# Altium PCB PCB.PcbDoc
Units mm, origin at the board's own origin, x right, y up, seen from the top; angles counter-clockwise.
Board outline 41.15 x 38.1 mm, 2 copper layers (Top Layer, Bottom Layer); 17 components, 12 nets, 47 pads, 4 vias.
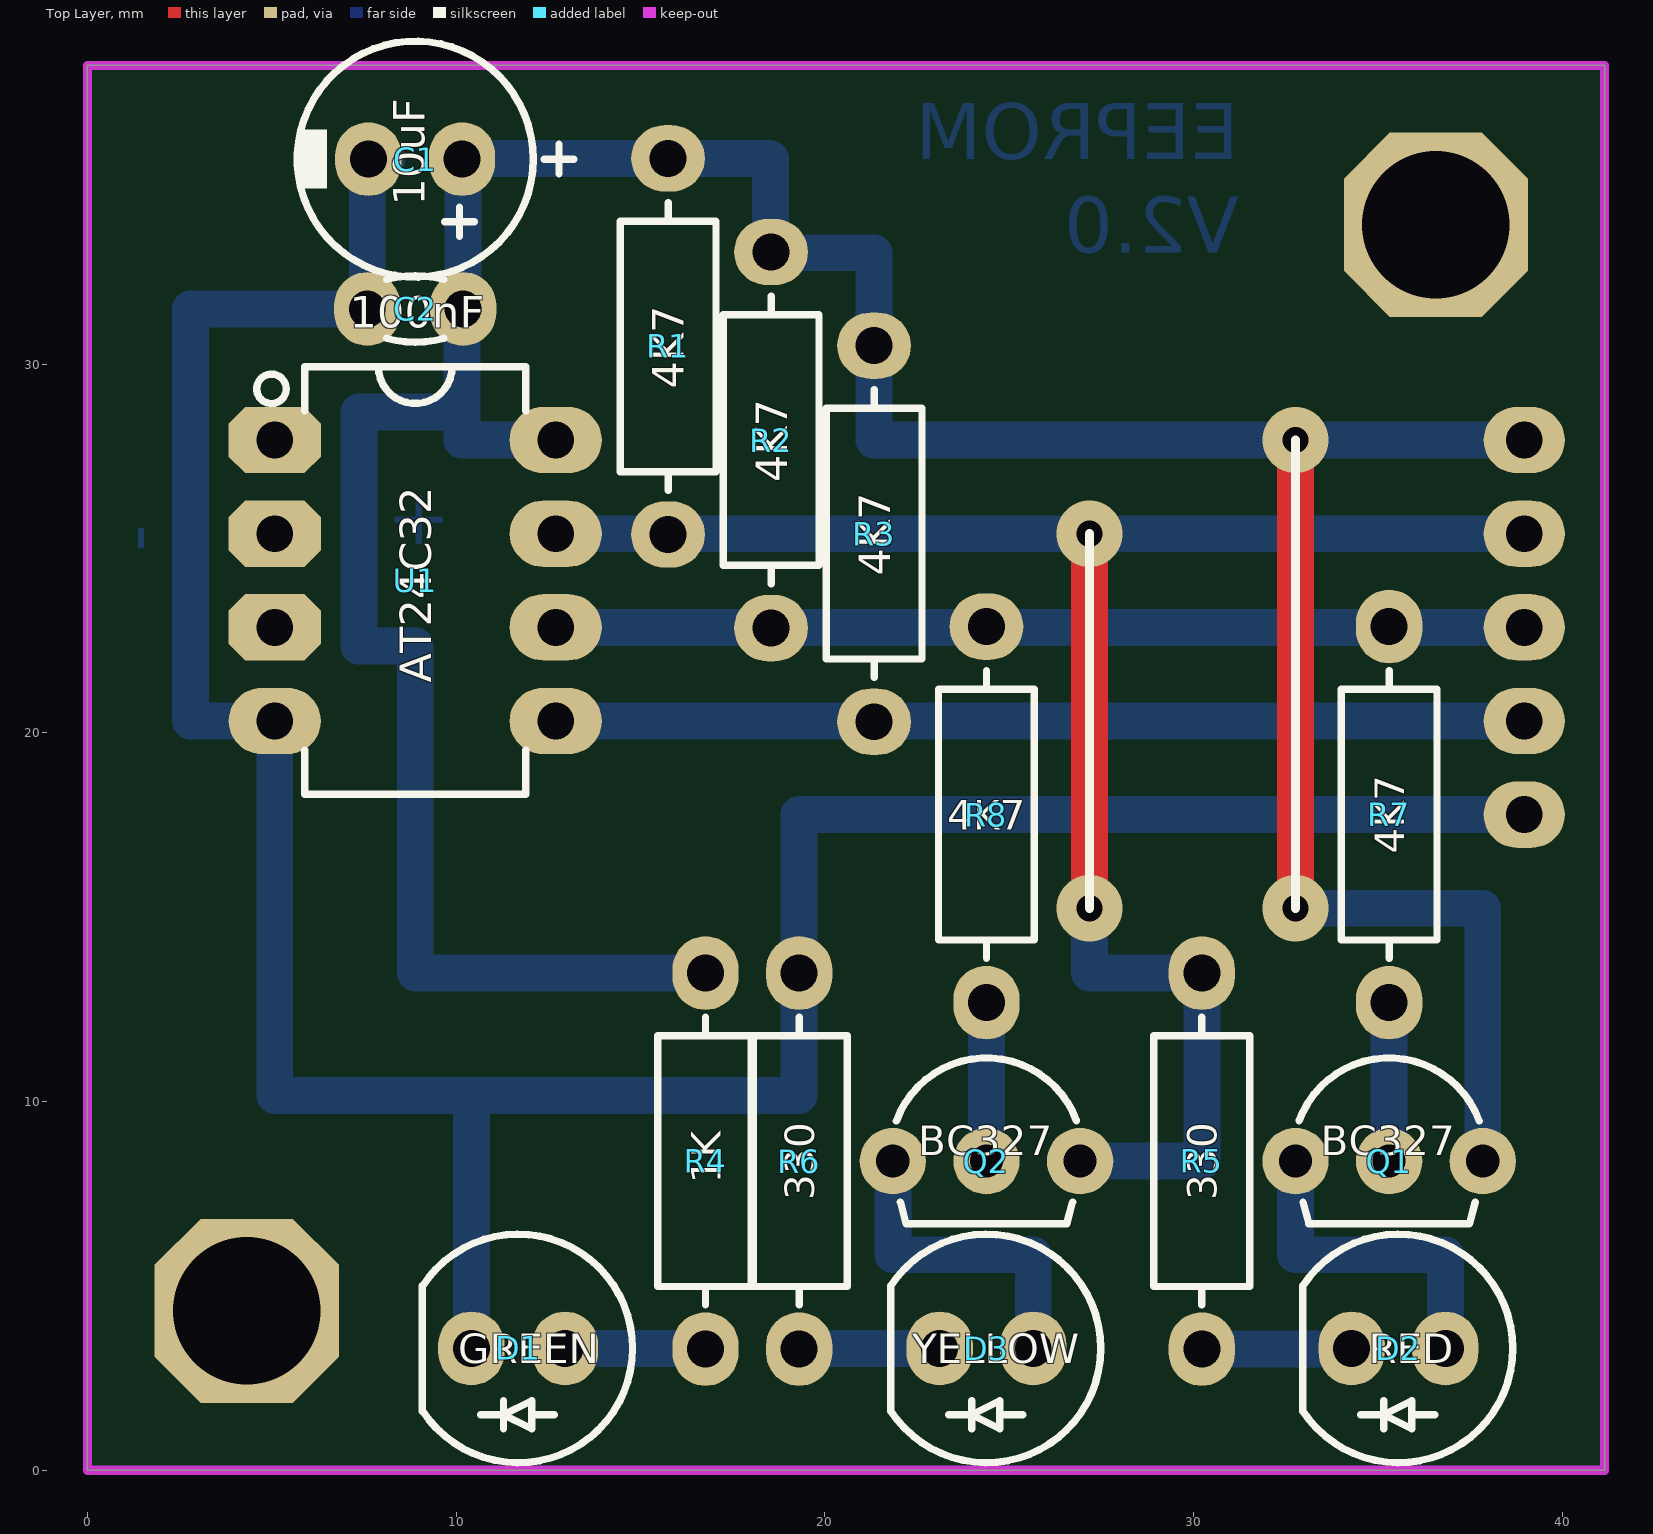
[diagram p0: Top Layer view]
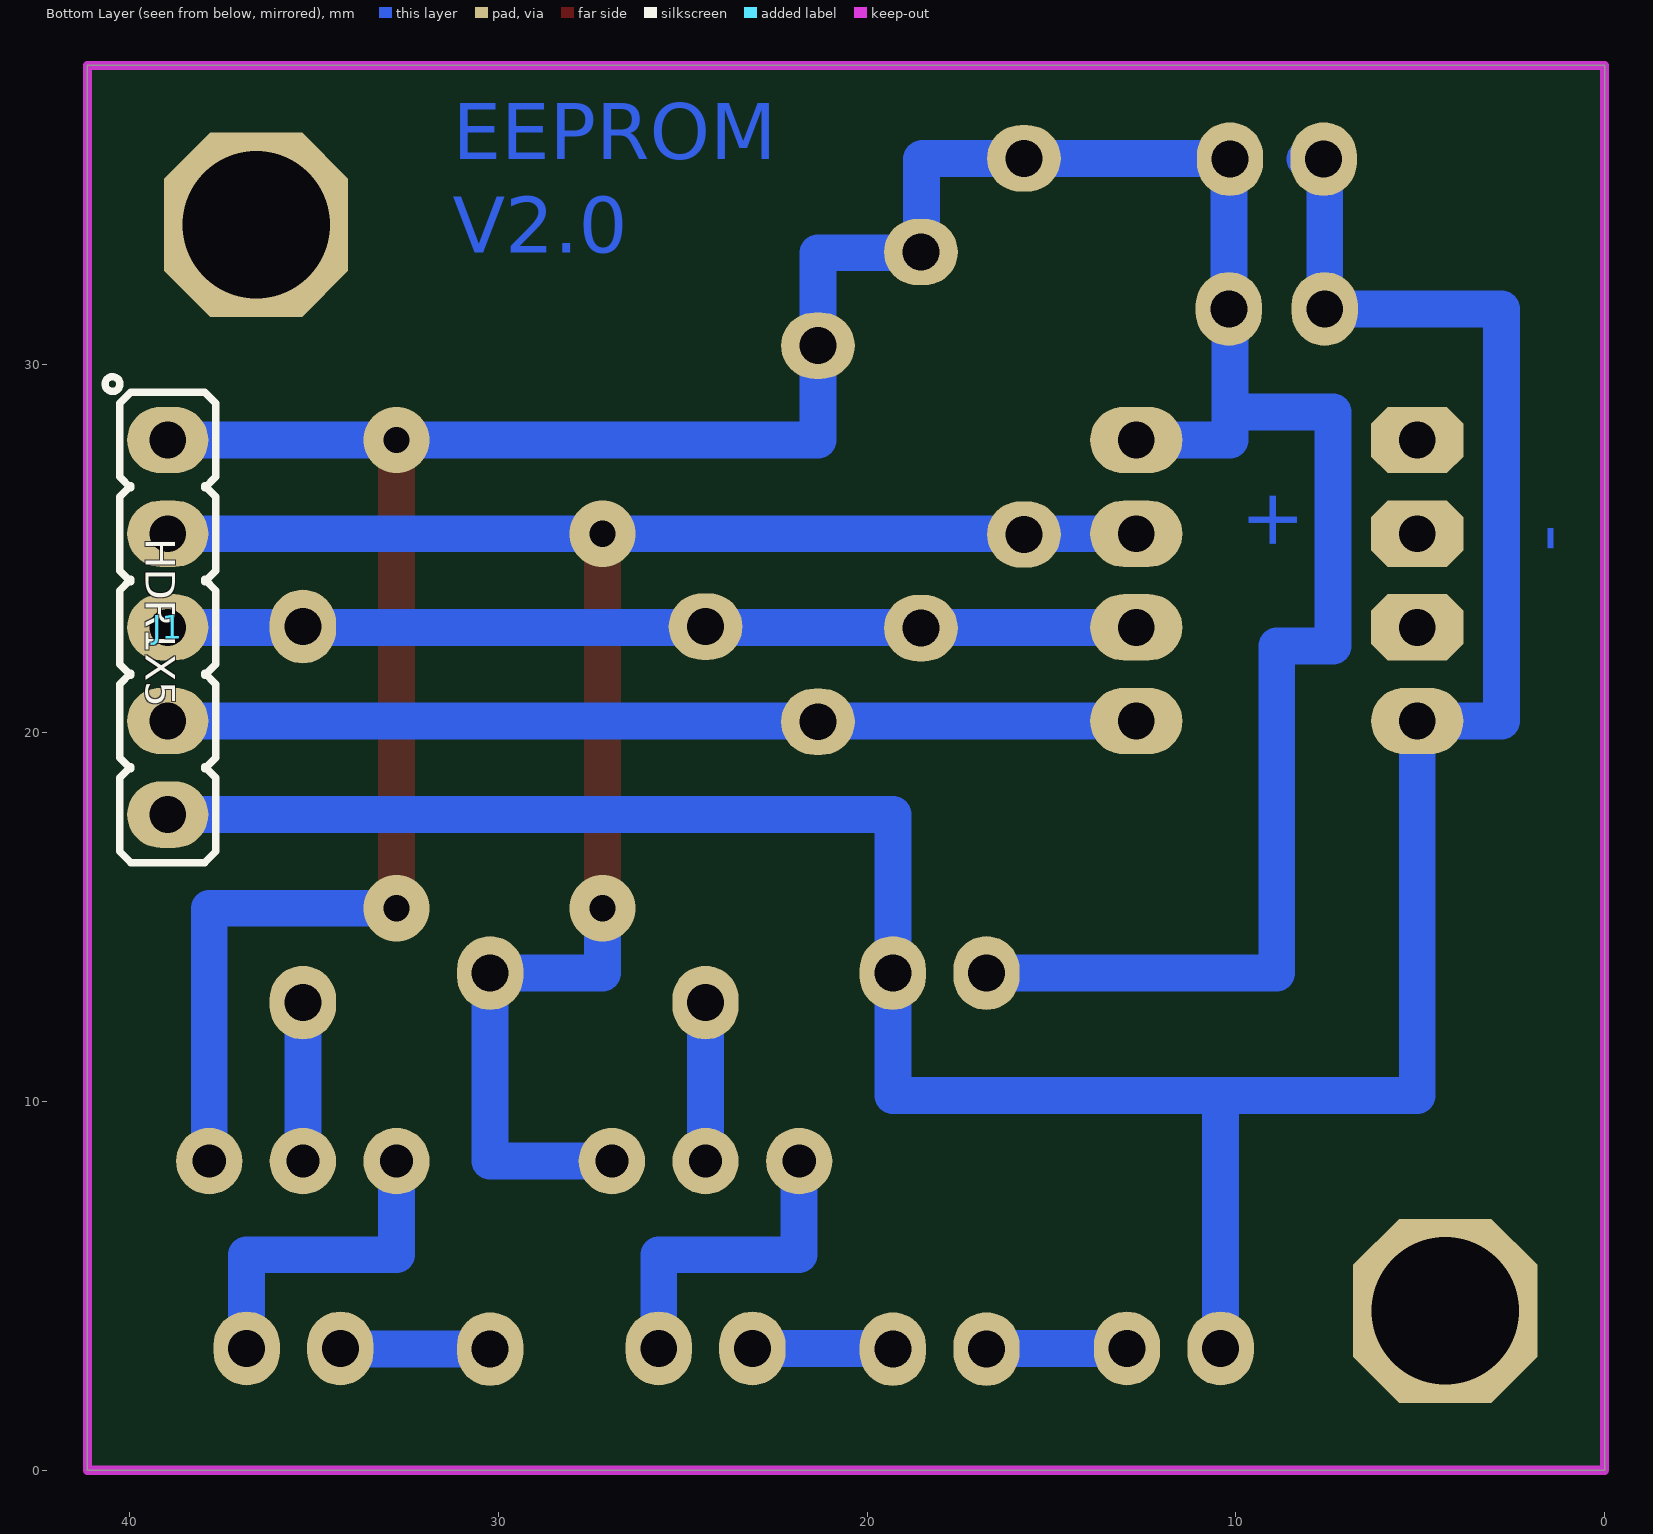
[diagram p1: Bottom Layer view, seen from below]

## Layer stack, top to bottom
Top Solder: solder mask 0.0102, Solder Resist, Dk 3.5
Top Layer: signal copper 0.0356
Dielectric 1: dielectric 0.32, FR-4, Dk 4.8
Bottom Layer: signal copper 0.0356
Bottom Solder: solder mask 0.0102, Solder Resist, Dk 3.5

## Board outline
0,0 41.148,0 41.148,38.1 0,38.1

## Design rules (kind name [scope] priority, off if disabled: settings)
Clearance [All] p1: gap=0.3
PolygonConnect [All] p1: connectstyle=Relief reliefconductorwidth=0.254 reliefentries=4 polygonreliefangle="90 Angle" airgapwidth=0.254
RoomDefinition Main [InComponentClass('Main')] p1: confinementstyle=ConfineIn formatcopy=TRUE lockcomponents=FALSE outline -24.638,-40.894 26.162,-40.894 26.162,-15.494 -24.638,-15.494
RoutingVias [All] p1: holewidth=0.3 width=0.6 viastyle="Through Hole" minholewidth=0.3 minwidth=0.6 maxholewidth=0.3 maxwidth=0.6
SolderMaskExpansion [All] p1: expansion=0.102
Width [All] p1: maxlimit=1 minlimit=0.3 preferedwidth=0.5
30 further rules are at their usual default settings.

## Components (designator, comment, footprint, x,y, rotation, side; value= is the part's Value field where it differs from the comment)
C1 "10uF" C_EL_6X11 8.89,35.56 r180 top
C2 "100nF" C_CER_D3 8.89,31.496 r0 top
D1 "GREEN" LED5MM_GRN 11.684,3.302 r180 top
D2 "RED" LED5MM_RED 35.56,3.302 r180 top
D3 "YELLOW" LED5MM_YLW 24.384,3.302 r180 top
J1 "HDR1X5" HDR_M_1X5 38.97,22.86 r270 bottom
Q1 "BC327" TO92_3A 35.306,8.382 r0 top
Q2 "BC327" TO92_3A 24.384,8.382 r0 top
R1 "4K7" R025W_AX04#1 15.748,30.48 r90 top
R2 "4K7" R025W_AX04#1 18.542,27.94 r90 top
R3 "4K7" R025W_AX04#1 21.336,25.4 r90 top
R4 "1K" R025W_AX04#2 16.764,8.382 r90 top
R5 "330" R025W_AX04#2 30.226,8.382 r90 top
R6 "330" R025W_AX04#2 19.304,8.382 r90 top
R7 "4K7" R025W_AX04#2 35.306,17.78 r90 top
R8 "4K7" R025W_AX04#3 24.384,17.78 r90 top
U1 "AT24C32" DIP_8 8.89,24.13 r0 top

## Footprints (in the part's own frame and the unit in brackets; to place one, negate y for a bottom-side part, rotate by r counter-clockwise, add the part's x,y. Pads: shape width x height; smd on the part's side, far side on the other; paste and mask are expansions set on the pad)
C_CER_D3 [mm] "CAP, CER MULTILAYER, D:3.5mm, pitch: 2.54mm"
  oval 1.8x2 hole 1: 1(-1.3,0) 2(1.3,0)
  silkscreen extent -0.78,-0.9 0.78,0.9, body extent -1.75,-0.75 1.75,0.75, height 4
C_EL_6X11 [mm] "Cap Elec, D6.3X11.0H pitch: 2.5mm"
  oval 1.8x2 hole 1: 1(-1.27,0) 2(1.27,0)
  silkscreen extent -4.3,-3.2 3.2,3.2, body extent -3.17,-3.18 3.18,3.18, height 2.51
DIP_8 [mm] "DIP, pitch 2.54mm, 300mil Width"
  oct 2.5x1.8 hole 1: 1(-3.81,3.81) 2(-3.81,1.27) 3(-3.81,-1.27)
  oval 2.5x1.8 hole 1: 4(-3.81,-3.81) 5(3.81,-3.81) 6(3.81,-1.27) 7(3.81,1.27) 8(3.81,3.81)
  silkscreen extent -4.3,-5.8 3,5.8, body extent -3.94,-5.7 3.94,5.73, height 4.19
HDR_M_1X5 [mm] "Connector; Header; 5 Position"
  oval 1.8x2.2 hole 1 mask+0.1: 1(-5.08,0) 2(-2.54,0) 3(0,0) 4(2.54,0) 5(5.08,0)
  silkscreen extent -6.8,-1.7 6.38,1.3, body extent -6.35,-1.27 6.35,1.27, height 8.54
LED5MM_GRN [mm] "LED THD 5MM GREEN"
  oval 1.8x2 hole 1: 1(-1.27,0) 2(1.27,0)
  silkscreen extent -3.1,-3.1 2.6,3.1, body extent -2.99,-3 2.5,3, height 9.14
LED5MM_RED [mm] "LED THD 5MM RED"
  oval 1.8x2 hole 1: 1(-1.27,0) 2(1.27,0)
  silkscreen extent -3.1,-3.1 2.6,3.1, body extent -3,-3 2.5,3, height 9.14
LED5MM_YLW [mm] "LED THD 5MM YELLOW"
  oval 1.8x2 hole 1: 1(-1.27,0) 2(1.27,0)
  silkscreen extent -3.1,-3.1 2.6,3.1, body extent -2.99,-3 2.5,3, height 9.14
R025W_AX04#1 [mm] "RESISTOR 1/4 WATT, AXIAL0.4"
  oval 1.8x2 hole 1: 1(-5.1,0) 2(5.1,0)
  silkscreen extent -3.9,-1.3 3.9,1.3, body extent -5.38,-1.28 5.38,1.28, height 2.6
R025W_AX04#2 [mm] "RESISTOR 1/4 WATT, AXIAL0.4"
  oval 2x1.8 hole 1: 1(-5.1,0) 2(5.1,0)
  silkscreen extent -3.9,-1.3 3.9,1.3, body extent -5.38,-1.28 5.38,1.28, height 2.6
R025W_AX04#3 [mm] "RESISTOR 1/4 WATT, AXIAL0.4"
  oval 2x1.8 hole 1: 1(-5.1,0)
  oval 1.8x2 hole 1: 2(5.1,0)
  silkscreen extent -3.9,-1.3 3.9,1.3, body extent -5.38,-1.28 5.38,1.28, height 2.6
TO92_3A [mm] "TO-92 BENDED TO-226, SOT54A"
  round 1.8 hole 0.9: 1(-2.54,0) 2(0,0) 3(2.54,0)
  silkscreen extent -2.44,-1.7 2.44,2.8, body extent -2.79,-1.59 2.79,2.61, height 7.8

## Part data
C1: library part CAP_THD_EL_10u25V, "CAP, THD, ELEC, 10uF, 25V"
C2: library part CAP_THD_CERML, "CAP, THD, CER MULTI LAYER,"
D1: library part LED_THD_5MM_GRN, "LED, THD, 5MM, GREEN"
D2: library part LED_THD_5MM_RED, "LED, THD, 5MM, RED"
D3: library part LED_THD_5MM_YLW, "LED, THD, 5MM, YELLOW"
J1: library part HDR_M_1X5, "CONN, HEADER, Male, pitch: 2.54mm, 5POS"
Q1 Q2: library part PNP_BC557_TO92, "BJT, PNP, 45v, 0.1A, THD, TO92"
R1 R2 R3 R4 R5 R6 R7 R8: library part RES_THD, "RESISTOR, THD"
U1: library part EEPROM_I2C_CAT24C64_DIP8, "EEPROM, I2C, 64Kbit (8K X8)"

## Free pads (board coordinates)
  oct 5x5 hole 4: 0(4.318,4.318) 0(36.576,33.782)

## Via types
v1: diameter 1.8, hole 0.711, Top Layer to Bottom Layer, 4 vias

## Nets (pads, with @x,y where several pads share a name; then routed paths per layer and width w, separated by ;. In a path a pad name is that pad's centre, name@x,y a point inside that pad or via, vN(x,y) a via of type N, cw(c..) or ccw(c..) an arc to the next point about the centre after c; other vN are vias at no path point)
5V: C1.1 C2.2 J1.1 Q1.3 R1.2 R2.2 R3.2 R4.2 U1.8 | length 98.7
  Top Layer w1: v1(32.766,15.24) v1(32.766,27.94)
  Bottom Layer w1: C1.1@9.759,35.453 9.886,35.58 R1.2 18.502,35.58 18.522,35.56 18.522,33.06 R2.2 18.562,33.02 21.336,33.02 R3.2 21.336,27.94 v1(32.766,27.94) J1.1@39.37,27.94 ; C1.1@10.19,35.022 C2.2 10.16,31.466 10.16,28.702 ; U1.8 10.16,27.94 10.16,28.702 ; R4.2@16.51,13.482 8.89,13.482 8.89,22.352 7.366,22.352 7.366,28.702 10.16,28.702 ; v1(32.766,15.24) 37.846,15.24 Q1.3
GND: C1.2 C2.1 D1.2 J1.5 R6.2 U1.4 | length 81.5
  Bottom Layer w1: C1.2@8.128,35.56 7.59,35.022 C2.1 2.794,31.496 2.794,20.32 U1.4 5.08,10.16 10.414,10.16 ; D1.2 10.414,10.16 ; J1.5@39.37,17.78 19.304,17.78 R6.2 19.304,10.16 10.414,10.16
NetD1_1: D1.1 R4.1 | length 3.5
  Bottom Layer w1: D1.1 R4.1@16.49,3.302
NetD2_1: D2.1 Q1.1 | length 9.1
  Bottom Layer w1: Q1.1 32.766,5.842 36.83,5.842 D2.1
NetD2_2: D2.2 R5.1 | length 4
  Bottom Layer w1: R5.1 D2.2@34.27,3.282
NetD3_1: D3.1 Q2.1 | length 8.9
  Bottom Layer w1: Q2.1 21.844,5.842 25.654,5.842 D3.1
NetD3_2: D3.2 R6.1 | length 3.8
  Bottom Layer w1: R6.1@19.324,3.302 D3.2
NetQ1_2: Q1.2 R7.1 | length 4.3
  Bottom Layer w1: Q1.2 R7.1
NetQ2_2: Q2.2 R8.1 | length 4.3
  Bottom Layer w1: Q2.2 R8.1
SCL: J1.3 R2.1 R7.2 R8.2 U1.6 | length 26.7
  Bottom Layer w1: U1.6 J1.3@39.37,22.86
SDA: J1.4 R3.1 U1.5 | length 26.7
  Bottom Layer w1: U1.5 J1.4@39.37,20.32
WP: J1.2 Q2.3 R1.1 R5.2 U1.7 | length 50
  Top Layer w1: v1(27.178,15.24) v1(27.178,25.4)
  Bottom Layer w1: U1.7 J1.2@39.37,25.4 ; Q2.3 30.226,8.382 R5.2 27.178,13.482 v1(27.178,15.24)
pads on no net: U1.1 U1.2 U1.3

## Keep-outs
Keep-Out Layer:
  the board outline again, w0.254

## Other copper
Bottom Layer:
  text "EEPROM" at 31.242,35.56 h1.52
  text "V2.0" at 31.242,33.02 h1.52
  text "-" at 2.032,24.892 h1.52 r90
  text "+" at 9.652,24.892 h1.52 r90

## Silkscreen, mask and mechanical layers (free items; w line width, h text height)
Top Overlay:
  lines w0.254: 27.178,15.24 27.178,25.4 ; 32.766,15.24 32.766,27.94
Mechanical 15:
  rectangle: 3.556,9.144 5.08,10.668
  rectangle: 14.478,9.144 16.002,10.668
  rectangle: 5.842,5.588 7.366,7.112
  rectangle: 9.652,5.588 11.176,7.112
  rectangle: 9.652,3.048 11.176,4.572
  rectangle: 5.842,3.048 7.366,4.572
  rectangle: 5.842,0.508 7.366,2.032
  rectangle: 9.652,0.508 11.176,2.032
  rectangle: 30.226,7.874 31.75,9.398
  rectangle: 25.654,5.334 27.178,6.858
  rectangle: 27.94,4.572 29.464,6.096
  rectangle: 30.226,2.54 31.75,4.064
  rectangle: 23.114,4.318 24.638,5.842
  rectangle: 20.066,7.112 21.59,8.636
  rectangle: 28.194,0.508 29.718,2.032
  rectangle: 23.114,0.762 24.638,2.286
  rectangle: 30.226,-2.794 31.75,-1.27
  rectangle: 26.67,-1.27 28.194,0.254
  rectangle: 13.208,-3.302 14.732,-1.778
  rectangle: 13.462,-5.842 14.986,-4.318
  rectangle: 17.272,-5.842 18.796,-4.318
  rectangle: 17.272,-3.556 18.796,-2.032